# EAGLE board V2Stim+EMG-A2530 (EAGLE 7.1.0)
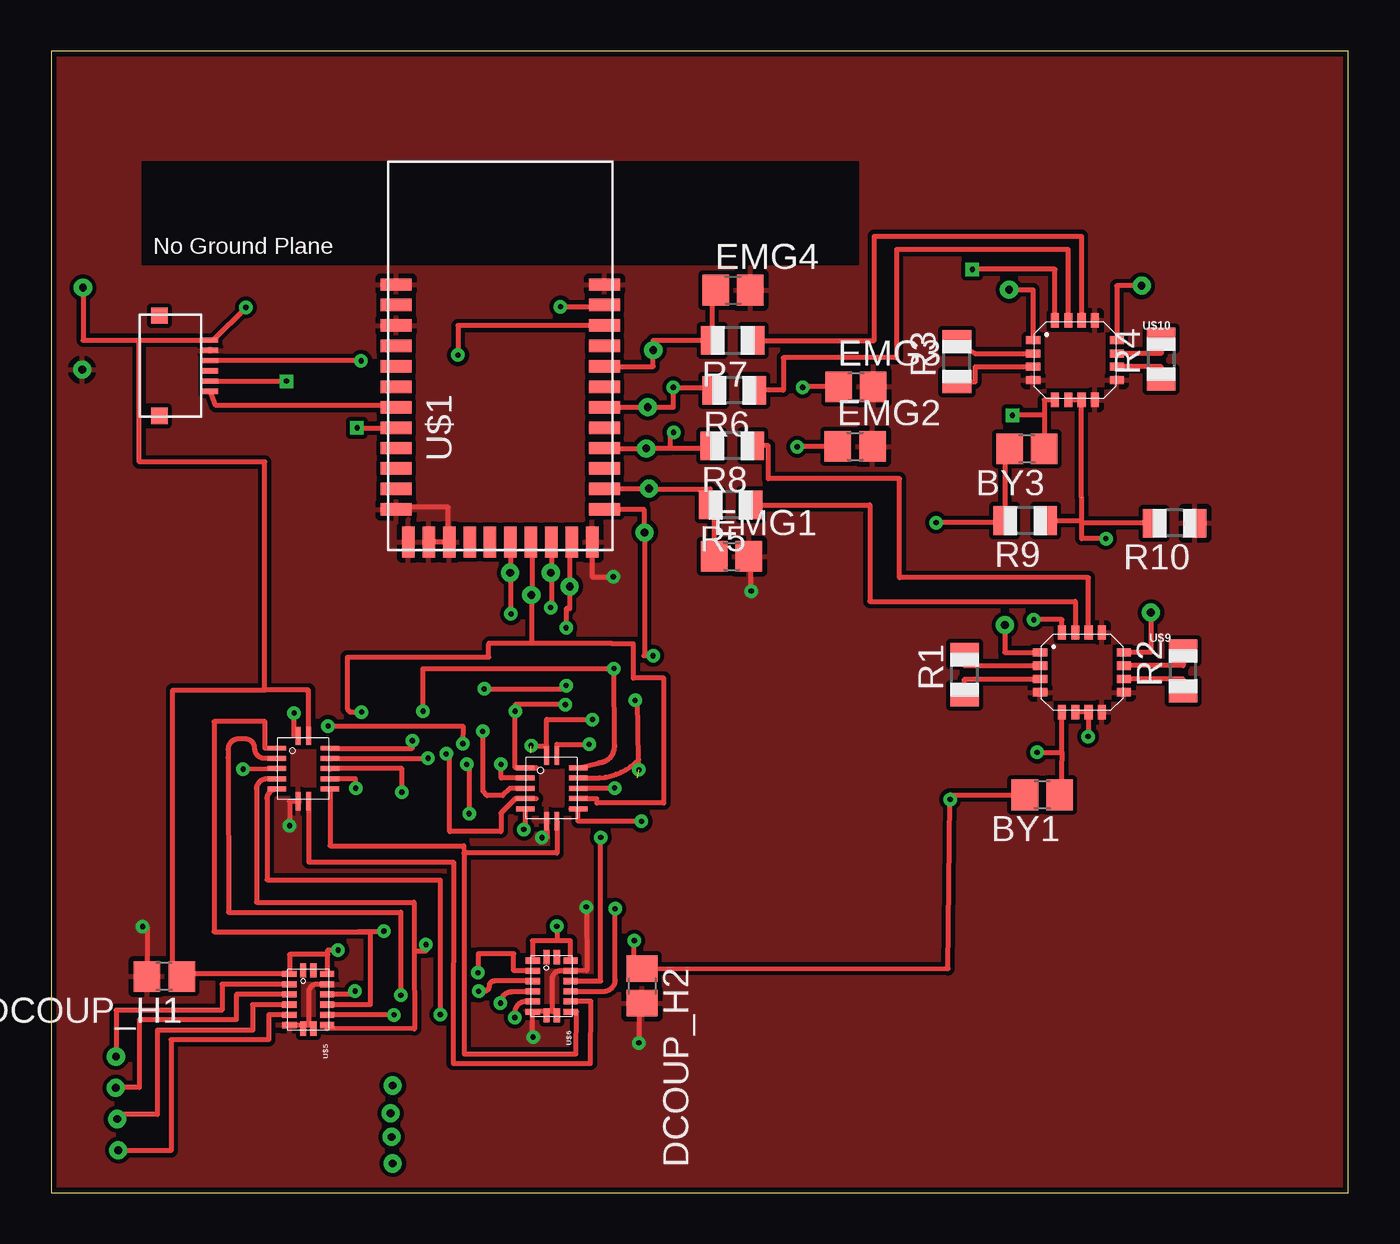
[diagram p0: board, top side]
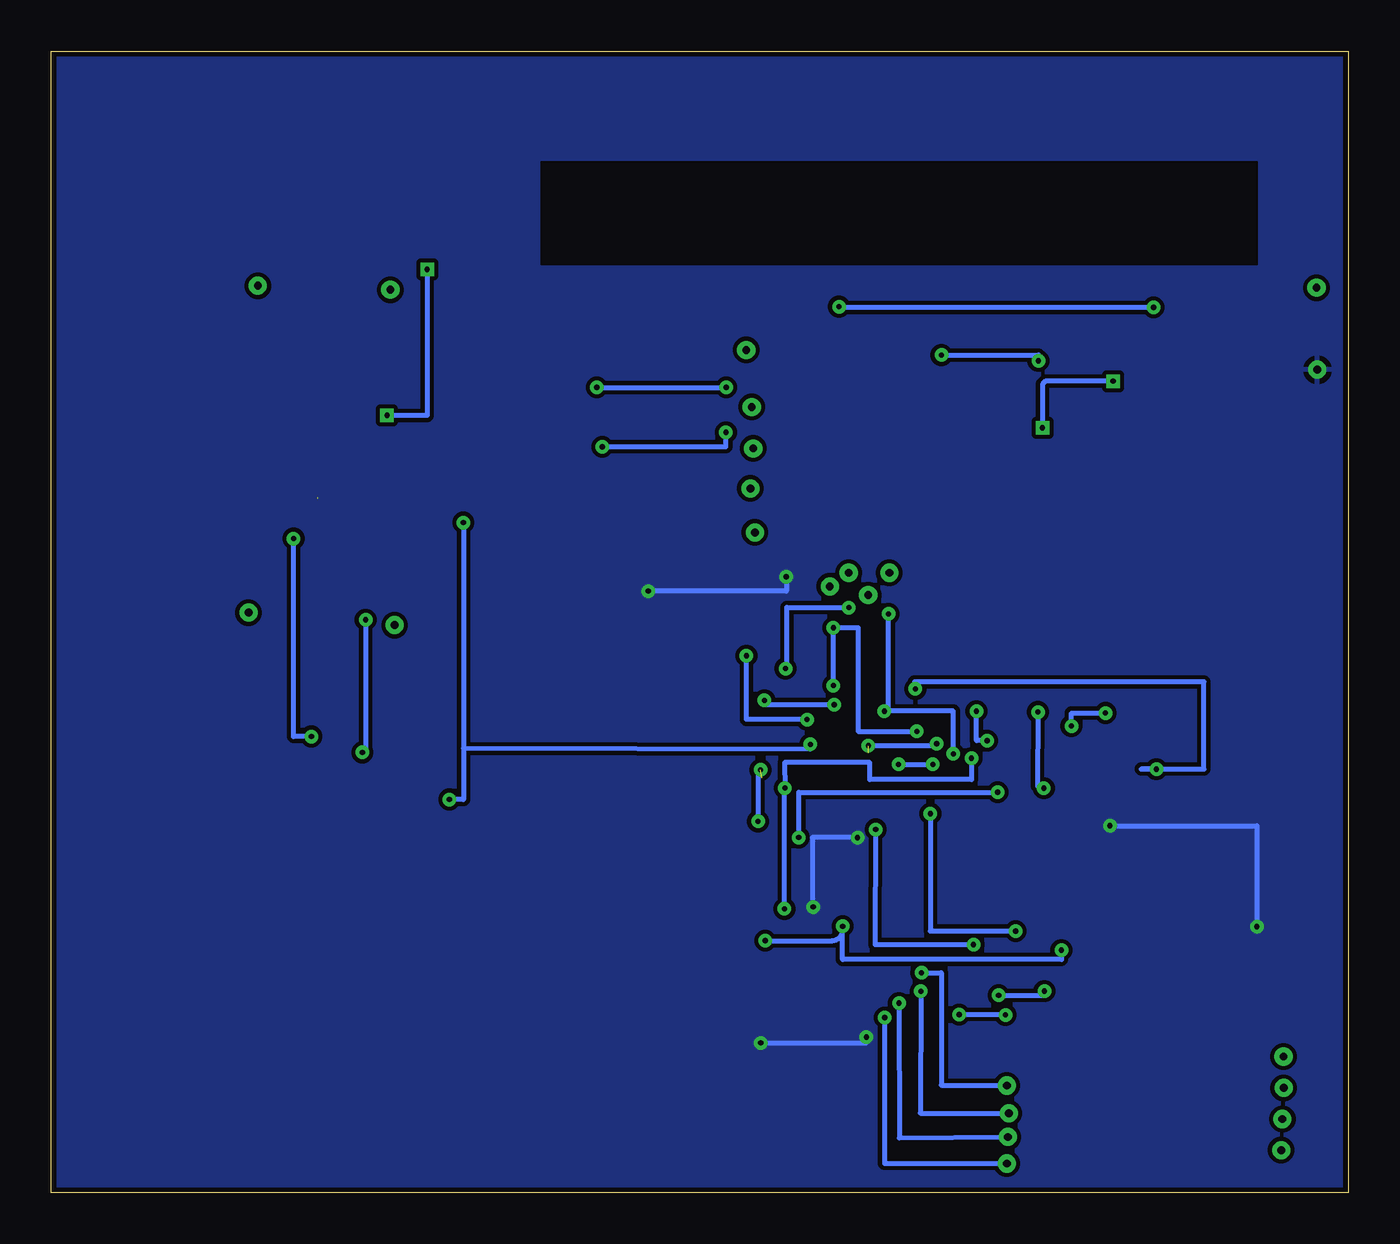
[diagram p1: board, bottom side, seen from below]

Size 63.5 x 55.88 mm. Coordinates in mm from the lower left corner, seen from the top.
Outline: 0,0 63.5,0 63.5,55.88 0,55.88 0,0
Copper layers (1*16): Top 0.035mm / dielectric 1.5mm / Bottom 0.035mm
Design rules "4pcb": minimum track width 8mil, minimum drill 10mil, track to track 8mil, track to pad 8mil, pad to pad 8mil, via to via 8mil, smd to smd 8mil, copper to edge 10mil, drill to drill 8mil, minimum pad ring 10mil, minimum via ring 8mil, stop-mask expansion 4mil, vias tented up to drill 0mil, thermal gap 10mil

## Footprints (pad centres in the part's own frame; a part is rotated, then mirrored left to right if it is on the bottom)
C0805 = smd 1.3 x 1.5: 1 -0.85,0; 2 0.85,0
R0805 = smd 1.1 x 1.4: 1 -1,0; 2 1,0
A2530 = smd 1.5 x 0.61: P$1 -5.1,0; P$2 -5.1,-1; P$3 -5.1,-2; P$4 -5.1,-3; P$5 -5.1,-4; P$6 -5.1,-5; P$7 -5.1,-6; P$8 -5.1,-7; P$9 -5.1,-8; P$10 -5.1,-9; P$11 -5.1,-10; P$12 -5.1,-11; P$23 5.1,-11; P$24 5.1,-10; P$25 5.1,-9; P$26 5.1,-8; P$27 5.1,-7; P$28 5.1,-6; P$29 5.1,-5; P$30 5.1,-4; P$31 5.1,-3; P$32 5.1,-2; P$33 5.1,-1; P$34 5.1,0 | smd 0.61 x 1.5: P$13 -4.5,-12.6; P$14 -3.5,-12.6; P$15 -2.5,-12.6; P$16 -1.5,-12.6; P$17 -0.5,-12.6; P$18 0.5,-12.6; P$19 1.5,-12.6; P$20 2.5,-12.6; P$21 3.5,-12.6; P$22 4.5,-12.6
FFC6POS = smd 0.762 x 0.254: 1 0.008,1.269; 2 0.008,0.769; 3 0.008,0.269; 4 0.008,-0.231; 5 0.008,-0.731; 6 0.008,-1.231 | smd 0.8 x 0.8: P$7 -2.49,2.47; P$8 -2.49,-2.43
QFN-14 = smd 0.9 x 0.24: A0 -1.6,-0.25; GND 1.6,-0.25; O3 1.6,0.25; VCC -1.6,0.25 | smd 0.24 x 0.9: A1 0,-1.3; A2 -1,1.3; A3 0.5,1.3; B0 -1,-1.3; B1 0.5,-1.3; B2 -0.5,1.3; B3 1,1.3; O1 1,-1.3; O2 0,1.3; O_0 -0.5,-1.3; P$11 -1,-1.3
QFN-12-HEATSINK = smd 0.3 x 0.7: AIN1 -0.25,0.925; AIN2 0.25,0.925; AOUT1 -0.75,-0.925; AOUT2 -0.25,-0.925; BIN1 0.75,0.925; BIN2 1.25,0.925; BOUT1 0.25,-0.925; BOUT2 0.75,-0.925; GND 1.25,-0.925; MODE -0.75,0.925; VCC -1.25,0.925; VM -1.25,-0.925 | smd 0.7 x 0.3: P$13 -1.425,0.25; P$14 -1.425,-0.25; P$15 1.425,0.25; P$16 1.425,-0.25
DEBUG_PIN = drill 0.381 pad 0.66: P$1 0,0
QFN-16 = smd 0.7 x 0.4: -IN1 -2.05,0.975; -IN2 2.05,0.975; IN1 -2.05,-0.975; IN2 2.05,-0.975; RG1 -2.05,0.325; RG1_B -2.05,-0.325; RG2 2.05,0.325; RG2_B 2.05,-0.325 | smd 0.4 x 0.7: -VS 0.975,1.95; -VS_B 0.975,-1.95; OUT1 -0.325,1.95; OUT2 0.325,1.95; REF1 -0.325,-1.95; REF2 0.325,-1.95; VS -0.975,1.95; VS_B -0.975,-1.95

## Placement (x,y rotation side)
BY1  .1uF  [C0805]  48.51,19.47 180 top
BY3  .1uF  [C0805]  47.76,36.4 180 top
DCOUP_H1  .1uF  [C0805]  5.54,10.58 180 top
DCOUP_H2  .1uF  [C0805]  28.93,10.12 270 top
EMG1  .1uF  [C0805]  33.3,31.15 0 top
EMG2  .1uF  [C0805]  39.35,36.53 0 top
EMG3  .1uF  [C0805]  39.39,39.45 0 top
EMG4  .1uF  [C0805]  33.38,44.18 0 top
R1  499  [R0805]  44.71,25.36 90 top
R2  499  [R0805]  55.41,25.54 90 top
R3  499  [R0805]  44.34,40.68 90 top
R4  499  [R0805]  54.34,40.81 90 top
R5  499  [R0805]  33.26,33.66 180 top
R6  499  [R0805]  33.44,39.27 180 top
R7  499  [R0805]  33.36,41.72 180 top
R8  499  [R0805]  33.34,36.56 180 top
R9  10k  [R0805]  47.68,32.9 180 top
R10  10k  [R0805]  54.99,32.77 180 top
U$1  A2530  [A2530]  21.99,44.45 0 top
U$2  FFC6POS  [FFC6POS]  7.79,40.46 0 top
U$3  AND_QUAD  [QFN-14]  24.5,19.79 270 top
U$4  XOR_QUAD  [QFN-14]  12.35,20.76 270 top
U$5  DRV8835  [QFN-12-HEATSINK]  12.59,9.46 270 top
U$6  DRV8835  [QFN-12-HEATSINK]  24.5,10.11 270 top
U$7  DEBUG_PIN  [DEBUG_PIN]  46.69,27.79 0 top
U$8  DEBUG_PIN  [DEBUG_PIN]  53.83,28.39 0 top
U$9  AD8222  [QFN-16]  50.45,25.47 0 top
U$10  AD8222  [QFN-16]  50.11,40.75 0 top
U$11  DEBUG_PIN  [DEBUG_PIN]  46.89,44.2 0 top
U$12  DEBUG_PIN  [DEBUG_PIN]  53.38,44.39 0 top
U$13  DEBUG_PIN  [DEBUG_PIN]  3.18,6.66 0 top
U$14  DEBUG_PIN  [DEBUG_PIN]  3.16,5.13 0 top
U$15  DEBUG_PIN  [DEBUG_PIN]  3.24,3.6 0 top
U$16  DEBUG_PIN  [DEBUG_PIN]  3.29,2.08 0 top
U$17  DEBUG_PIN  [DEBUG_PIN]  16.72,5.25 0 top
U$18  DEBUG_PIN  [DEBUG_PIN]  16.62,3.89 0 top
U$19  DEBUG_PIN  [DEBUG_PIN]  16.67,2.73 0 top
U$20  DEBUG_PIN  [DEBUG_PIN]  16.72,1.43 0 top
U$21  DEBUG_PIN  [DEBUG_PIN]  29.05,32.32 0 top
U$22  DEBUG_PIN  [DEBUG_PIN]  24.46,30.35 0 top
U$23  DEBUG_PIN  [DEBUG_PIN]  23.51,29.25 0 top
U$24  DEBUG_PIN  [DEBUG_PIN]  22.47,30.35 0 top
U$25  DEBUG_PIN  [DEBUG_PIN]  25.38,29.67 0 top
U$26  DEBUG_PIN  [DEBUG_PIN]  1.56,44.3 0 top
U$27  DEBUG_PIN  [DEBUG_PIN]  1.52,40.28 0 top
U$28  DEBUG_PIN  [DEBUG_PIN]  29.47,41.25 0 top
U$29  DEBUG_PIN  [DEBUG_PIN]  29.2,38.46 0 top
U$30  DEBUG_PIN  [DEBUG_PIN]  29.14,36.43 0 top
U$31  DEBUG_PIN  [DEBUG_PIN]  29.27,34.47 0 top

## Library data of the parts
BY1 BY3 DCOUP_H1 DCOUP_H2 EMG1-EMG4 R1-R10 = adafruit
U$1 U$2 = CC2530_PCB_TL
U$3-U$6 U$9 U$10 = kushal
U$7 U$8 U$11-U$31 = James_custom

## Nets
+3V0: BY1.2 BY3.2 DCOUP_H1.1 DCOUP_H2.1 R9.2 U$1.P$33 U$2.1 U$3.VCC U$4.VCC U$5.VCC U$5.VM U$6.VCC U$6.VM U$26.P$1
A0: U$5.AOUT1 U$13.P$1
A1: U$5.AOUT2 U$14.P$1
B0: U$5.BOUT1 U$15.P$1
B1: U$5.BOUT2 U$16.P$1
BCLK: U$1.P$18 U$3.B0 U$3.B1 U$3.B2 U$3.B3 U$24.P$1
C0: U$6.AOUT1 U$17.P$1
C1: U$6.AOUT2 U$18.P$1
D0: U$6.BOUT1 U$19.P$1
D1: U$6.BOUT2 U$20.P$1
EMG1: EMG1.1 R5.2 U$1.P$24 U$31.P$1
EMG2: EMG2.1 R8.2 U$1.P$26 U$30.P$1
EMG3: EMG3.1 R6.2 U$1.P$28 U$29.P$1
EMG4: EMG4.1 R7.2 U$1.P$30 U$28.P$1
GND: DCOUP_H1.2 DCOUP_H2.2 EMG1.2 EMG2.2 EMG3.2 EMG4.2 R10.1 U$1.P$1 U$1.P$3 U$1.P$12 U$1.P$13 U$1.P$14 U$1.P$15 U$1.P$22 U$1.P$34 U$2.2 U$3.GND U$4.GND U$5.GND U$5.MODE U$6.GND U$6.MODE U$9.-VS U$9.-VS_B U$9.IN1 U$9.IN2 U$10.-VS U$10.-VS_B U$10.IN1 U$10.IN2 U$27.P$1
IN1: U$7.P$1 U$9.-IN1
IN2: U$8.P$1 U$9.-IN2
IN3: U$10.-IN1 U$11.P$1
IN4: U$10.-IN2 U$12.P$1
N$1: R1.2 U$9.RG1
N$2: R1.1 U$9.RG1_B
N$3: R2.2 U$9.RG2
N$5: R2.1 U$9.RG2_B
N$6: R3.2 U$10.RG1
N$7: R3.1 U$10.RG1_B
N$8: R4.2 U$10.RG2
N$9: R4.1 U$10.RG2_B
N$10: R5.1 U$9.OUT1
N$11: R8.1 U$9.OUT2
N$12: R6.1 U$10.OUT1
N$13: R7.1 U$10.OUT2
N$16: BY3.1 U$10.VS U$10.VS_B
N$17: BY1.1 U$9.VS U$9.VS_B
NEG1: U$3.O_0 U$4.B0 U$5.AIN2
NEG2: U$3.O1 U$4.B1 U$5.BIN2
NEG3: U$3.O2 U$4.B2 U$6.AIN2
NEG4: U$3.O3 U$4.B3 U$6.BIN2
P1: U$1.P$23 U$3.A0 U$4.A0 U$21.P$1
P2: U$1.P$21 U$3.A1 U$4.A1 U$25.P$1
P2_1: U$1.P$8 U$2.5
P2_2: U$1.P$7 U$2.6
P3: U$1.P$20 U$3.A2 U$4.A2 U$22.P$1
P4: U$1.P$19 U$3.A3 U$4.A3 U$23.P$1
POS1: U$4.O_0 U$5.AIN1
POS2: U$4.O1 U$5.BIN1
POS3: U$4.O2 U$6.AIN1
POS4: U$4.O3 U$6.BIN1
REF: R9.1 R10.2 U$9.REF1 U$9.REF2 U$10.REF1 U$10.REF2
RESET_N: U$1.P$32 U$2.3

## Tracks (layer width: path | path; a pad name or v marks a point on that pad's centre or on a via)
+3V0  (via drill 0.25)
  Top 0.254: v9.54,43.33 7.94,41.73 U$2.1 4.32,41.73 | v24.93,43.37 27.09,43.37 U$1.P$33 | U$4.VCC 12.6,24.49 12.6,24.6 12.5,24.6 10.46,24.6 | BY3.2 46.68,36.4 R9.2 46.68,32.8 v43.32,32.8 | BY1.2 44.01,19.47 v44.01,19.24 43.91,10.96 DCOUP_H2.1 28.54,11.36 v28.54,12.34 | U$5.VCC 13.55,10.74 13.55,11.66 | 13.55,11.66 11.67,11.66 U$5.VM 6.39,10.71 DCOUP_H1.1 5.96,10.58 5.96,24.6 10.46,24.6 | U$6.VCC 25.43,12.34 24.76,12.34 | 24.76,12.34 23.57,12.34 23.57,11.36 U$6.VM | U$3.VCC 24.75,21.94 v26.34,21.94 | 10.46,24.6 10.46,35.77 4.32,35.77 4.32,41.73 | U$26.P$1 1.56,41.73 4.32,41.73 | 13.55,11.66 13.55,11.88 v14.05,11.88 | v24.76,13.04 24.76,12.34
  Bottom 0.254: v9.54,43.33 24.93,43.33 v24.93,43.37 | v43.32,32.8 43.32,21.75 | 43.32,21.75 43.32,19.24 v44.01,19.24 | v26.34,21.94 26.34,21.71 43.32,21.75 | v14.05,11.88 14.05,11.41 24.76,11.41 v24.76,13.04 24.76,12.85 arc90 25.27,12.34 v28.54,12.34
A0
  Top 0.254: U$5.AOUT1 8.36,10.21 8.36,8.93 3.18,8.93 U$13.P$1
A1
  Top 0.254: U$5.AOUT2 9.06,9.71 9.06,8.46 4.32,8.46 4.32,5.16 3.17,5.16 U$14.P$1
B0
  Top 0.254: U$5.BOUT1 9.86,9.21 9.87,7.96 5.2,7.96 5.19,3.83 3.24,3.83 U$15.P$1
B1
  Top 0.254: U$5.BOUT2 10.66,8.71 10.66,7.49 5.88,7.49 5.88,2.06 3.29,2.06 U$16.P$1
BCLK  (via drill 0.25, 0.25 pad 0.25)  (1 unrouted)
  Top 0.254: U$3.B2 25.83,20.3 | U$3.B2 25.81,20.3 25.63,20.29 | 23.74,20.79 U$3.B0 22.72,20.79 v22.72,23.57 22.72,23.89 v25.17,23.89 | 23.75,19.29 U$3.B1 22.73,19.29 22.02,18.59 22.02,17.68 19.51,17.68 19.51,21.48 v19.34,21.48 | 25.43,18.79 U$3.B3 25.8,18.17 v28.89,18.17 | U$1.P$18 22.49,30.34 | 22.49,30.34 U$24.P$1 | 22.49,30.34 22.49,28.33 v22.51,28.33 | v28.77,20.69 28.76,21.19 | 28.76,21.19 28.7,24.1 v28.59,24.1 | U$3.B2 26.6,20.29 arc46 28.76,21.19
  Bottom 0.254: v22.51,28.33 22.51,23.57 v22.72,23.57 19.34,23.57 v19.34,21.48 | v28.77,20.69 28.89,20.35 v28.89,18.17 | v28.59,24.1 28.59,23.89 v25.17,23.89
C0  (via drill 0.25)
  Top 0.254: U$6.AOUT1 22.64,10.86 22.64,11.69 20.91,11.69 v20.9,10.77
  Bottom 0.254: v20.9,10.77 19.93,10.77 19.93,5.27 16.72,5.27 U$17.P$1
C1  (via drill 0.25)
  Top 0.254: U$6.AOUT2 21.69,10.36 arc90 21.44,10.11 arc-90 21.19,9.86 20.83,9.86 v20.93,9.86
  Bottom 0.254: v20.93,9.86 20.96,3.89 U$18.P$1
D0  (via drill 0.25)
  Top 0.254: U$6.BOUT1 23.58,9.83 22.55,9.83 arc90 v21.99,9.28
  Bottom 0.254: v21.99,9.28 22,9.23 21.98,2.68 U$19.P$1
D1  (via drill 0.25)
  Top 0.254: U$6.BOUT2 23.27,9.37 arc92 22.71,8.85 v22.7,8.57
  Bottom 0.254: v22.7,8.57 22.7,1.43 U$20.P$1
EMG1
  Top 0.254: EMG1.1 32.45,33.66 R5.2 32.26,34.45 29.27,34.45 U$31.P$1 27.09,34.47 U$1.P$24
EMG2  (via drill 0.25)
  Top 0.254: 30.3,36.45 32.34,36.45 R8.2 | EMG2.1 36.52,36.53 v36.52,36.51 | v30.47,37.22 30.3,37.22 30.3,36.45 | U$1.P$26 27.09,36.43 U$30.P$1 30.3,36.43 30.3,36.45
  Bottom 0.254: v36.52,36.51 30.47,36.51 v30.47,37.22
EMG3  (via drill 0.25)
  Top 0.254: EMG3.1 36.79,39.45 v36.79,39.42 | R6.2 32.44,39.42 v30.45,39.42 30.45,38.45 U$1.P$28 U$29.P$1
  Bottom 0.254: v36.79,39.42 v30.45,39.42
EMG4
  Top 0.254: U$1.P$30 29.47,40.44 U$28.P$1 29.47,41.72 R7.2 32.36,44.18 EMG4.1
GND  (via drill 0.25)
  Top 0.254: U$4.GND 11.68,19.16 v11.68,17.96 | v4.48,13.02 4.7,13.02 DCOUP_H1.2 | U$5.MODE 13,10.21 arc90 12.62,9.82 12.62,8.2 U$5.GND | U$1.P$14 U$1.P$15 19.44,31.85 19.44,33.55 16.89,33.55 U$1.P$12 | DCOUP_H2.2 28.77,9.27 v28.77,7.33 | v23.59,7.62 23.58,7.62 U$6.GND 24.53,8.87 24.53,10.48 arc-90 24.91,10.86 U$6.MODE 26.23,10.87 v26.2,13.98 | U$3.GND 24.29,17.39 v24.03,17.38 | U$1.P$22 26.49,30.14 v27.52,30.14 | v34.27,29.44 34.27,31.15 EMG1.2
  Bottom 0.254: v11.68,17.96 4.48,17.96 v4.48,13.02 | v28.77,7.33 23.59,7.33 v23.59,7.62 | v24.03,17.38 26.24,17.38 26.23,13.86 v26.2,13.98 | v27.52,30.14 27.52,29.44 v34.27,29.44
  pour Top: 0,55.88 63.5,55.88 63.5,0 0,0
  pour Bottom: 0,55.88 63.5,55.88 63.5,0 0,0
IN1
  Top 0.254: U$7.P$1 46.69,26.44 U$9.-IN1
IN2
  Top 0.254: U$8.P$1 53.83,26.44 U$9.-IN2
IN3
  Top 0.254: U$11.P$1 48.06,44.2 U$10.-IN1
IN4
  Top 0.254: U$12.P$1 52.16,44.39 U$10.-IN2
N$1
  Top 0.254: R1.2 44.71,25.79 U$9.RG1
N$2
  Top 0.254: R1.1 44.71,25.14 U$9.RG1_B
N$3
  Top 0.254: R2.2 55.41,25.79 U$9.RG2
N$5
  Top 0.254: R2.1 55.41,25.14 U$9.RG2_B
N$6
  Top 0.254: R3.2 45.23,41.08 U$10.RG1
N$7
  Top 0.254: U$10.RG1_B 45.23,40.43 45.23,39.68 R3.1
N$8
  Top 0.254: R4.2 54.34,41.08 U$10.RG2
N$9
  Top 0.254: R4.1 54.34,40.43 U$10.RG2_B
N$10
  Top 0.254: R5.1 40.07,33.66 40.07,28.95 50.13,28.95 U$9.OUT1
N$11
  Top 0.254: 50.86,27.42 U$9.OUT2 50.78,30.11 41.52,30.11 41.52,34.95 35.11,34.95 35.11,36.56 R8.1
N$12
  Top 0.254: U$10.OUT1 49.79,46.16 41.38,46.16 41.38,40.87 35.84,40.87 35.84,39.27 R6.1
N$13
  Top 0.254: R7.1 40.29,41.72 40.29,46.81 50.44,46.81 U$10.OUT2
N$16  (via drill 0.25)
  Top 0.254: U$10.VS_B 48.61,38.8 48.61,38.08 | 48.61,38.08 BY3.1 | U$10.VS 49.14,45.2 v45.09,45.2 | v47.05,38.05 47.05,38.08 48.61,38.08
  Bottom 0.254: v45.09,45.2 45.09,38.05 v47.05,38.05
N$17  (via drill 0.25)
  Top 0.254: BY1.1 49.48,19.4 49.48,21.17 49.48,21.55 | 49.48,21.55 U$9.VS_B | U$9.VS 49.48,28.05 v48.1,28.05 | v48.27,21.55 49.48,21.55
  Bottom 0.254: v48.1,28.05 48.1,21.55 v48.27,21.55
NEG1  (via drill 0.25)
  Top 0.254: 15.05,12.77 7.97,12.77 7.97,23.06 10.47,23.06 10.47,21.76 U$4.B0 | 15.05,12.77 15.62,12.77 15.62,9.2 13.52,9.2 U$5.AIN2 | U$3.O_0 22.03,20.29 v22.02,20.97 | v20.34,20.97 20.46,20.74 v20.46,18.55 | v16.29,12.8 16.29,12.77 15.05,12.77
  Bottom 0.254: v22.02,20.97 v20.35,20.97 v20.34,20.97 | v20.46,18.55 20.46,12.8 v16.29,12.8
NEG2  (via drill 0.25)
  Top 0.254: U$4.B1 10.56,20.26 arc90 10.05,19.75 10.05,14.21 17.76,14.21 17.78,11.81 | 17.78,11.81 17.79,8.01 13.5,8.03 U$5.BIN2 | U$3.O1 23.2,17.77 v23.14,17.77 | v18.35,12.14 18.35,11.82 17.78,11.81
  Bottom 0.254: v23.14,17.77 23.17,12.15 v18.35,12.14
NEG3  (via drill 0.25)
  Top 0.254: U$4.B2 18.45,21.26 v18.45,21.27 | v27.58,19.81 27.6,19.79 U$3.O2 | U$6.AIN2 25.43,9.85 26.98,9.85 arc90 27.61,10.4 v27.61,13.9
  Bottom 0.254: v18.45,21.27 18.45,20.22 23.43,20.22 23.43,21.06 27.6,21.06 v27.58,19.81 27.6,19.79 v27.61,13.9
NEG4
  Top 0.254: U$4.B3 13.65,16.98 20.2,16.98 20.2,16.62 | 20.2,16.62 20.22,6.79 25.68,6.79 25.72,8.86 U$6.BIN2 | U$3.O3 24.75,16.62 20.2,16.62
P1  (via drill 0.25)  (1 unrouted)
  Top 0.254: v13.56,22.84 20.16,22.84 v20.15,21.98 | v23.5,21.88 24.25,21.87 | U$3.A0 24.25,21.87 | 24.25,21.87 24.25,23.16 v26.5,23.16 | 29.02,26.29 v29.47,26.29 29.05,26.29 U$21.P$1 29.02,32.32 29.02,33.45 U$1.P$23 | U$1.P$23 | U$4.A0 11.89,22.36 v11.89,23.48
  Bottom 0.254: 13.56,22.81 v13.56,22.84 13.56,23.48 v11.89,23.48 | v26.5,23.16 29.47,23.16 v29.47,26.29 | v20.15,21.98 20.15,21.88 v23.5,21.88
P2  (via drill 0.25)
  Top 0.254: U$1.P$21 25.39,31.85 U$25.P$1 | v25.21,27.65 25.21,28.59 25.39,28.59 U$25.P$1 | U$4.A1 11.05,20.72 v9.4,20.73 | v21.2,24.66 25.21,24.66 v25.21,24.82 | U$3.A1 22.46,19.79 22.11,19.44 21.35,19.44 21.13,19.66 v21.13,22.57 v21.12,22.58 | U$25.P$1
  Bottom 0.254: v21.12,22.58 24,22.58 24,27.65 v25.21,27.65 v25.21,24.82 | v9.4,20.73 10.14,20.74 7.07,20.74 7.07,25 21.24,25 21.24,24.66 v21.2,24.66
P2_1  (via drill 0.25)
  Top 0.254: U$2.5 v11.52,39.73 v11.52,39.72 | v14.98,37.44 16.88,37.44 U$1.P$8
  Bottom 0.254: v11.52,39.72 14.82,39.72 14.98,39.57 v14.98,37.44
P2_2
  Top 0.254: U$2.6 8.07,38.53 16.86,38.53 U$1.P$7
P3  (via drill 0.25)
  Top 0.254: U$3.A2 26.82,21.04 arc90 27.58,21.9 v27.55,25.66 18.2,25.66 v18.2,23.56 | U$4.A2 17.68,21.76 v17.68,22.13 | U$1.P$20 24.49,30.49 | 24.49,30.49 U$22.P$1 | 24.49,30.49 24.49,28.64 v24.45,28.64
  Bottom 0.254: v27.55,25.66 27.48,25.66 27.49,28.65 24.46,28.65 v24.45,28.64 | v17.68,22.13 18.2,22.13 v18.2,23.56
P4  (via drill 0.25 pad 0.25)
  Top 0.254: 21.45,26.9 21.45,26.87 | 21.45,26.9 21.43,26.87 21.43,26.22 14.49,26.22 14.49,23.68 14.65,23.52 v15.19,23.52 | v14.91,19.8 14.9,20.26 U$4.A3 | U$1.P$19 23.53,31.85 23.53,29.25 | 23.53,26.9 23.53,26.89 27.46,26.88 28.5,26.88 28.5,25.19 30,25.19 30,19.08 26.71,19.08 26.7,19.28 U$3.A3 | 21.45,26.9 23.53,26.9 | 23.53,26.9 23.53,29.25 | 23.53,29.25 U$23.P$1
  Bottom 0.254: v15.19,23.52 15.22,19.9 15.07,19.87 v14.91,19.8
POS1  (via drill 0.25)
  Top 0.254: v17.12,9.66 17.12,13.72 8.68,13.73 8.67,21.28 8.67,21.7 arc-90 9.17,22.21 9.51,22.21 arc-90 9.96,21.77 arc90 10.47,21.26 U$4.O_0 | v14.88,9.86 14.88,9.71 U$5.AIN1
  Bottom 0.254: v17.12,9.66 14.88,9.67 v14.88,9.86
POS2  (via drill 0.25)
  Top 0.254: U$4.O1 arc90 10.57,19.28 10.57,15.32 19.05,15.31 v19.05,8.72 | v16.78,8.7 U$5.BIN1
  Bottom 0.254: v19.05,8.72 16.78,8.73 v16.78,8.7
POS3  (via drill 0.25)
  Top 0.254: 13.68,20.74 13.65,20.74 U$4.O2 17.17,20.76 v17.17,19.6 | U$6.AIN1 26.9,10.36 v26.9,17.38
  Bottom 0.254: v26.9,17.38 26.9,19.6 v17.17,19.6
POS4
  Top 0.254: U$4.O3 12.61,19.16 12.61,16.19 19.7,16.19 19.68,6.33 26.4,6.33 26.42,9.37 U$6.BIN1
REF  (via drill 0.25)  (1 unrouted)
  Top 0.254: U$9.REF1 U$9.REF2 50.76,23.52 v50.76,22.33 | U$10.REF1 U$10.REF2 50.44,34.03 | v51.63,32.02 50.45,32.02 50.45,32.77 | 50.45,32.9 50.45,34.01 | R9.1 50.45,32.9 | 50.45,32.9 50.45,32.77 | R10.2 50.45,32.77
  Bottom 0.254: v50.76,22.33 51.63,22.33 v51.63,32.02
RESET_N  (via drill 0.25)
  Top 0.254: U$1.P$32 19.92,42.45 v19.92,41 | v15.17,40.72 U$2.3
  Bottom 0.254: v19.92,41 15.17,41 v15.17,40.72